# Altium PCB PA-15-30W-VAR2.PcbDoc
Units mm, origin at the board's own origin, x right, y up, seen from the top; angles counter-clockwise.
Board outline 100 x 100 mm, 2 copper layers (Top Layer, Bottom Layer), stack 1.571 mm thick; 175 components, 119 nets, 501 pads, 0 vias.
Unrouted connection lines stored in the file: 376.
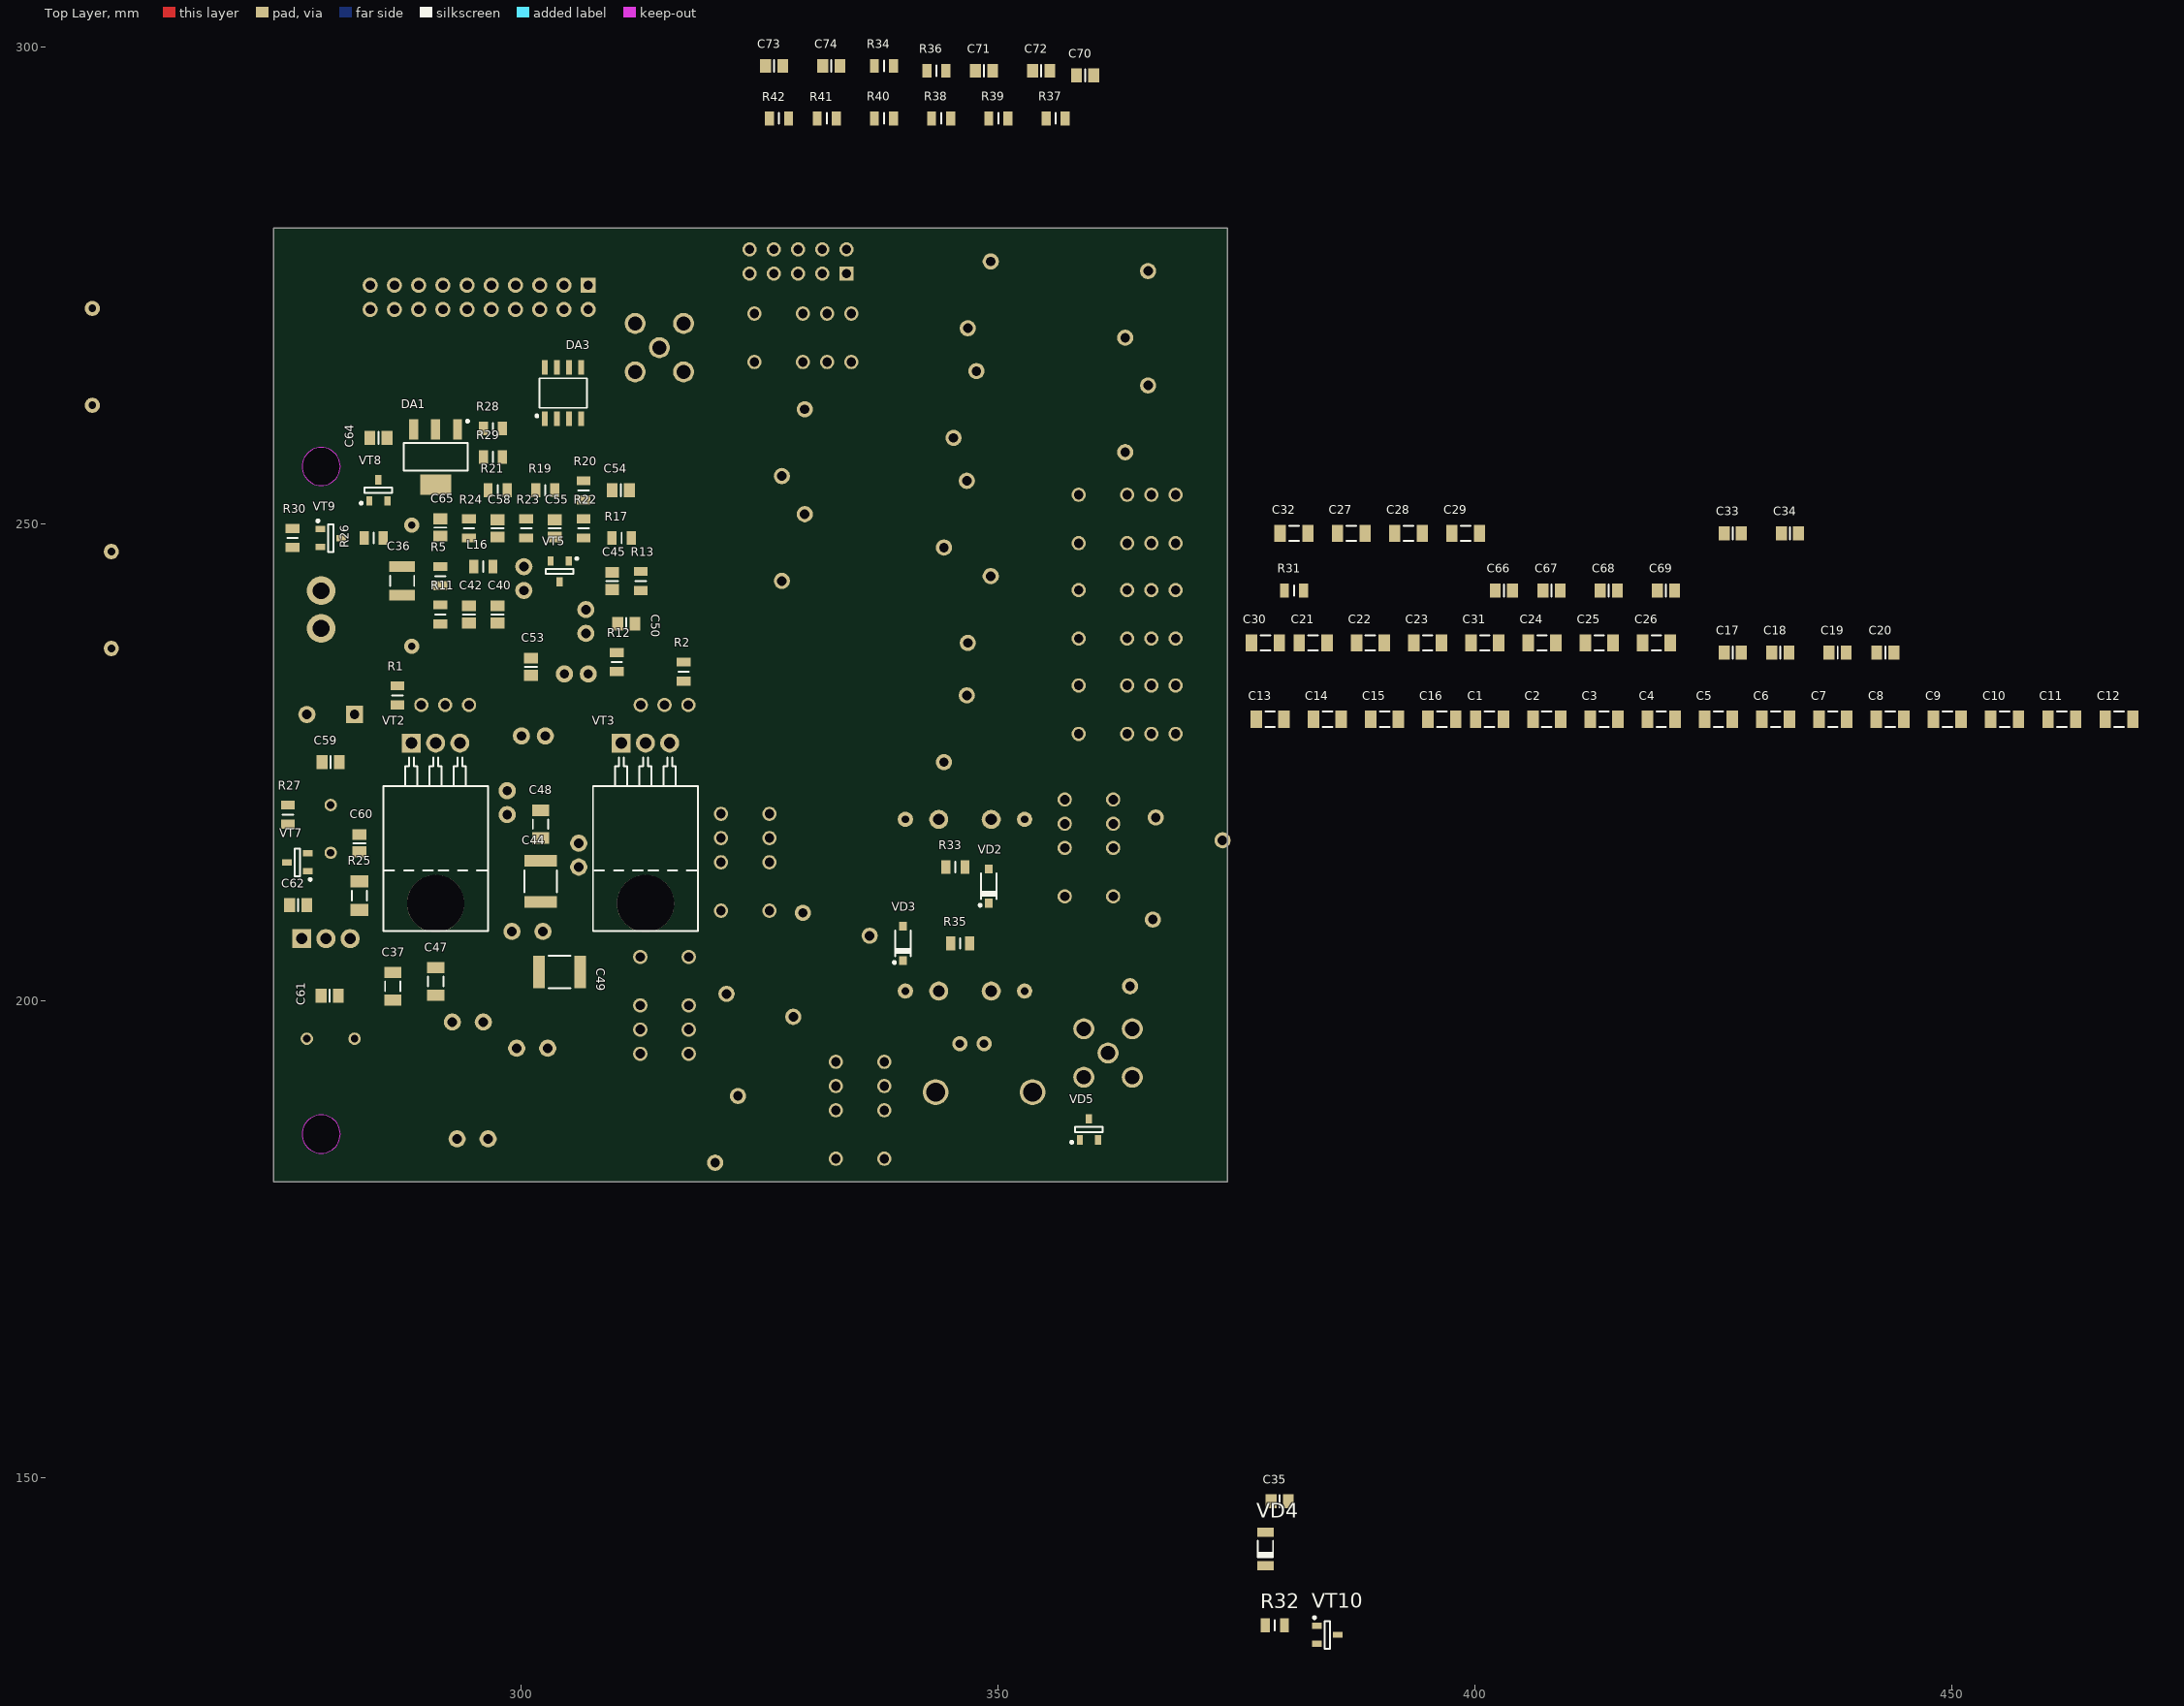
[diagram p0: Top Layer view]
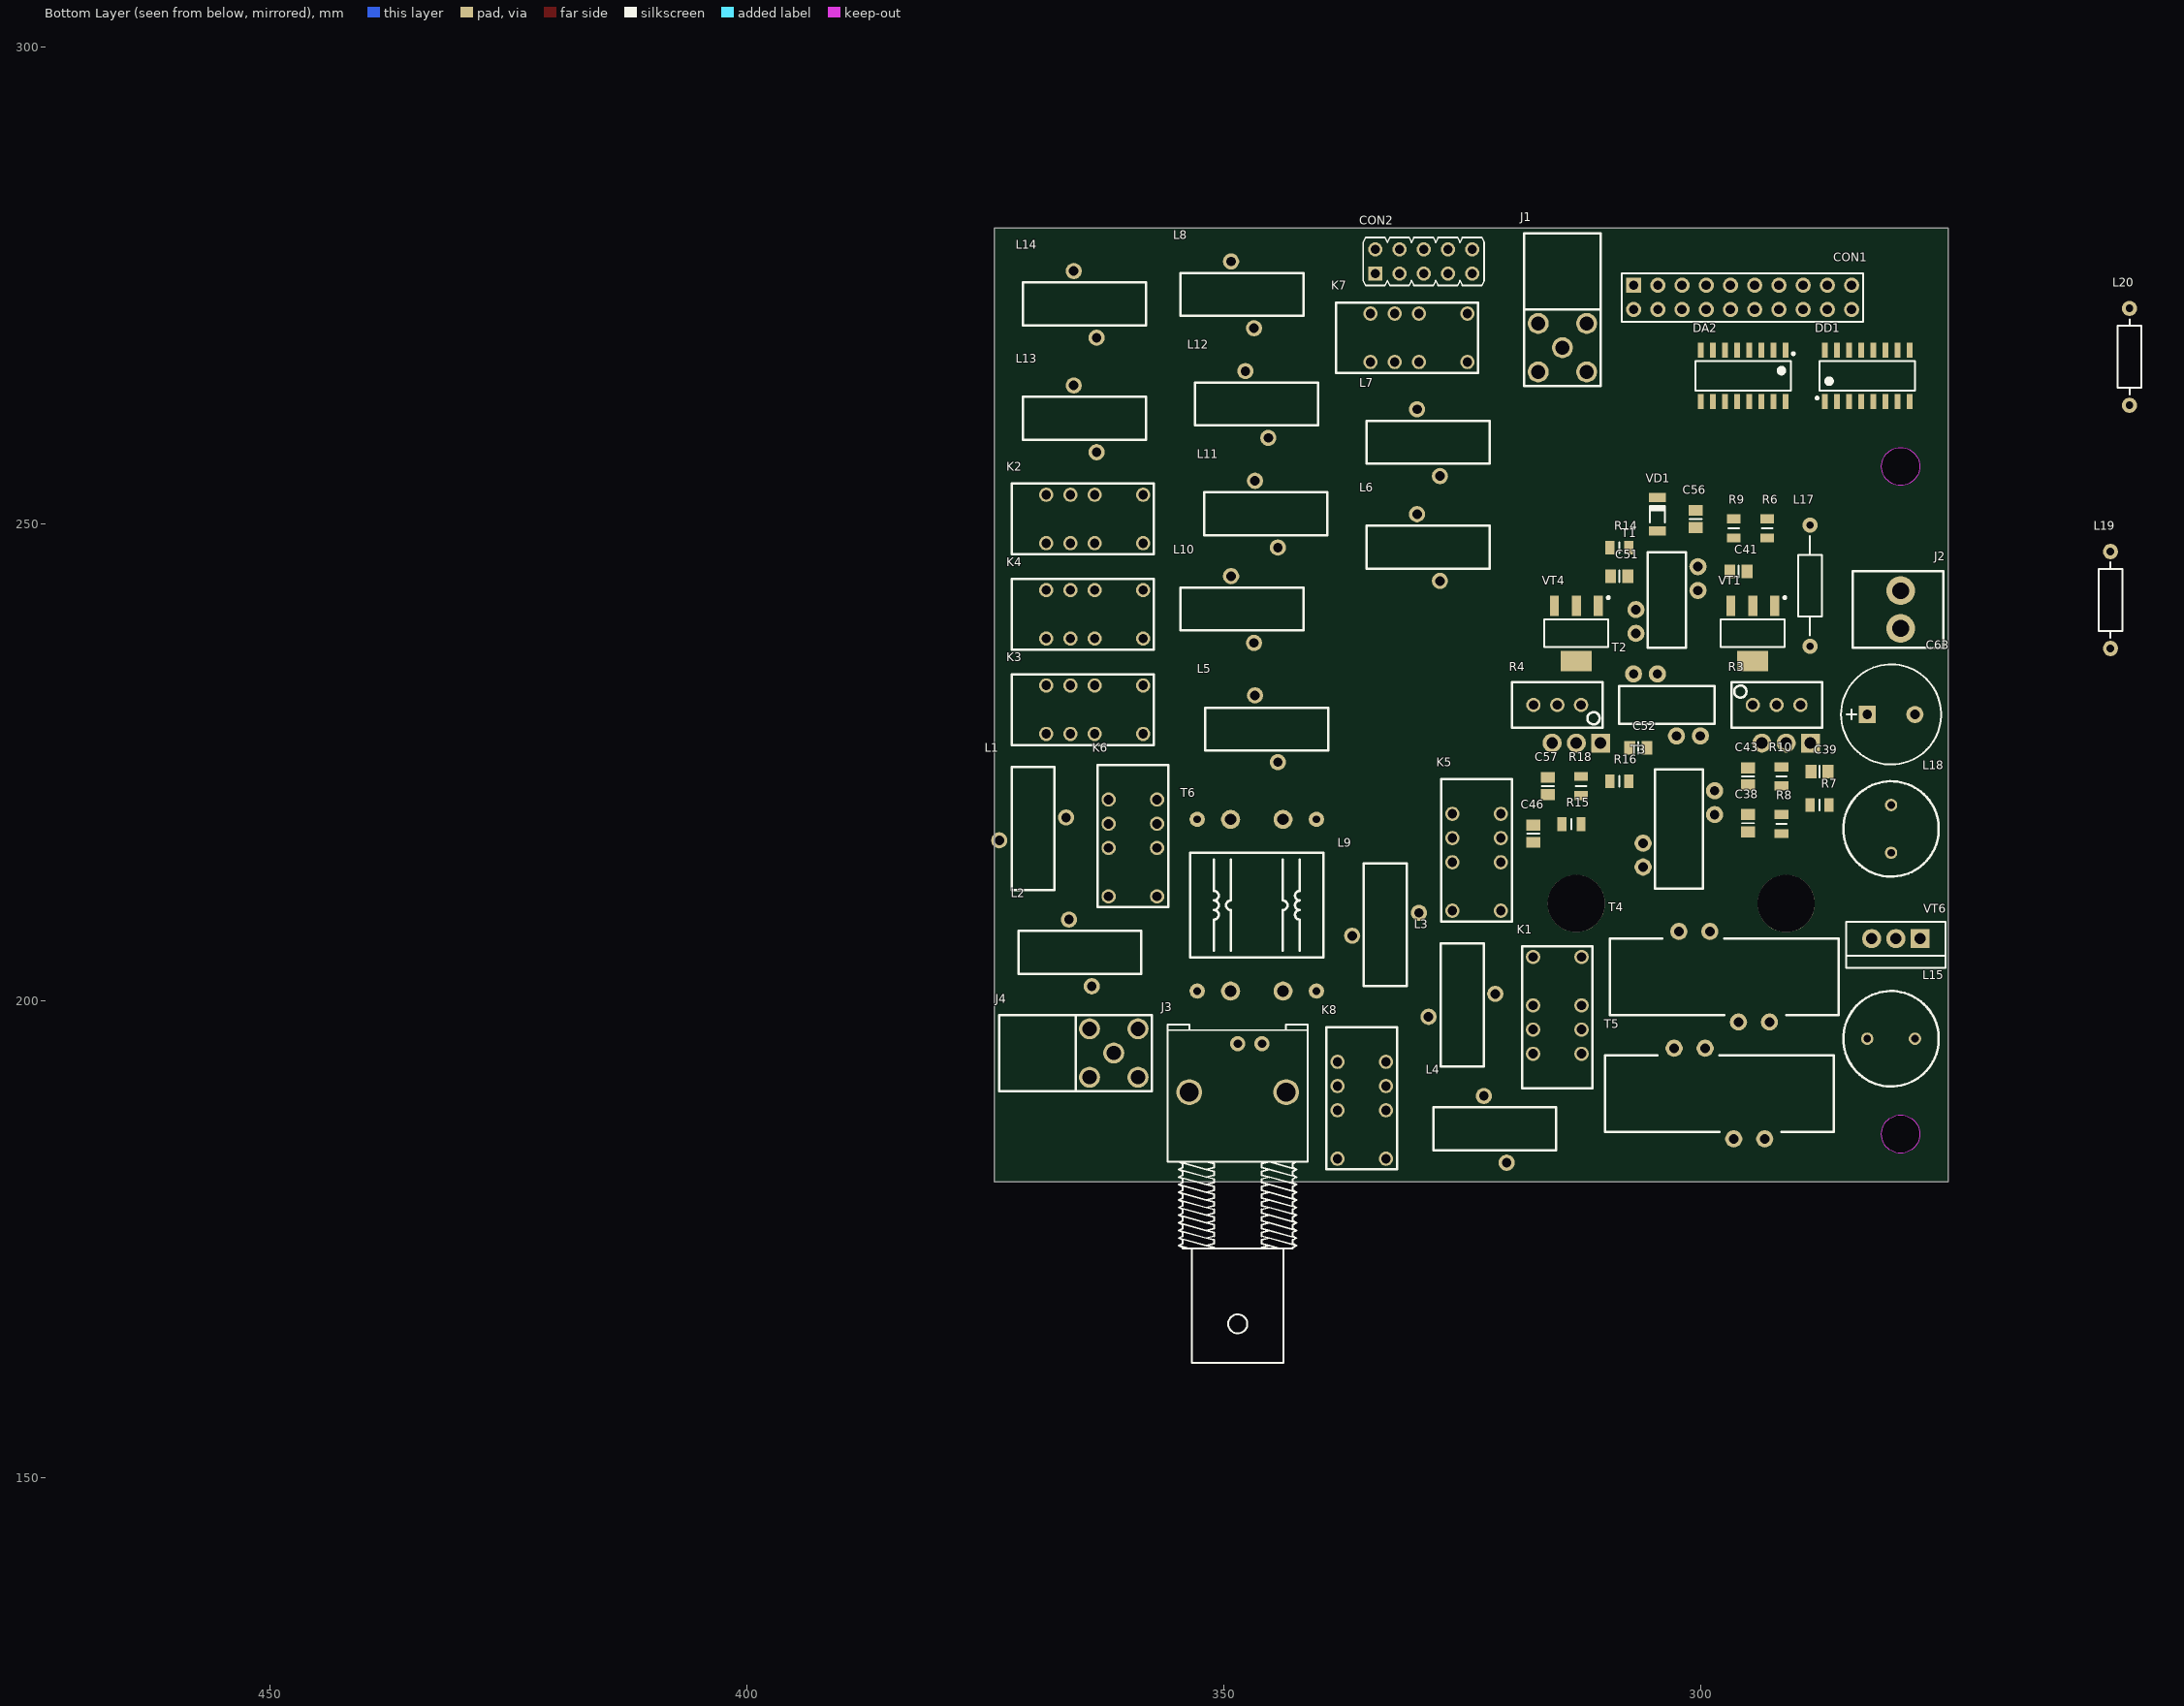
[diagram p1: Bottom Layer view, seen from below]

## Layer stack, top to bottom
Top Solder: solder mask 0.0102, Solder Resist, Dk 3.5
Top Layer: signal copper 0.0356
Dielectric 1: dielectric 1.5, FR-4, Dk 4.8
Bottom Layer: signal copper 0.0356
Bottom Solder: solder mask 0.0102, Solder Resist, Dk 3.5

## Board outline
274,281 374,281 374,181 274,181
cut-out: 277,256 ccw(c279,256) 279,254 ccw(c279,256) 281,256 ccw(c279,256) 279,258 ccw(c279,256)
cut-out: 277,186 ccw(c279,186) 279,184 ccw(c279,186) 281,186 ccw(c279,186) 279,188 ccw(c279,186)

## Design rules (kind name [scope] priority, off if disabled: settings)
Clearance [All] p1: gap=0.254 ignorepadtopadclearanceinfootprint=FALSE except(0: Arc-Hole Track-Hole SMDPad-Hole THPad-Hole Via-Hole Fill-Hole Poly-Hole Region-Hole Text-Hole)
ComponentClearance [All] p1: gap=0.5 collisioncheckmode=3 verticalgap=0.5 showdistances=TRUE donotcheckwithout3dbody=TRUE checkcomponentboundary=TRUE
PolygonConnect [All] p1: connectstyle=Relief reliefconductorwidth=0.254 reliefentries=4 polygonreliefangle="90 Angle" airgapwidth=0.254
RoutingVias [All] p1: holewidth=0.711 width=1.27 viastyle="Through Hole" minholewidth=0.711 minwidth=1.27 maxholewidth=0.711 maxwidth=1.27
SolderMaskExpansion [All] p1: expansion=0.102 istentingtop=FALSE
Width [All] p1: maxlimit=0.254 minlimit=0.254 preferedwidth=0.254
29 further rules are at their usual default settings.

## Classes and differential pairs
net class HF_LPF[0..6]: HF_LPF0 HF_LPF1 HF_LPF2 HF_LPF3 HF_LPF4 HF_LPF5 HF_LPF6
component class swr-antenna: C70 C71 C72 C73 C74 DA3 J3 J4 K8 L19 L20 R33 R34 R35 R36 R37 R38 R39 R40 R41 R42 T6 VD2 VD3 VD4 VD5
component class LPF: C1 C2 C3 C4 C5 C6 C7 C8 C9 C10 C11 C12 C13 C14 C15 C16 C17 C18 C19 C20 C21 C22 C23 C24 C25 C26 C27 C28 C29 C30 C31 C32 C33 C34 C35 K1 K2 K3 K4 K5 K6 K7 L1 L2 L3 L4 L5 L6 L7 L8 L9 L10 L11 L12 L13 L14
component class control-interface: C66 C67 C68 C69 CON1 CON2 DA2 DD1 R31 R32 VT10
component class amplifier: C36 C37 C38 C39 C40 C41 C42 C43 C44 C45 C46 C47 C48 C49 C50 C51 C52 C53 C54 C55 C56 C57 C58 C59 C60 C61 C62 C63 C64 C65 DA1 J1 J2 L15 L16 L17 L18 R1 R2 R3 R4 R5 R6 R7 R8 R9 R10 R11 R12 R13 R14 R15 R16 R17 R18 R19 R20 R21 R22 R23 R24 R25 R26 R27 R28 R29 R30 T1 T2 T3 T4 T5 VD1 VT1 VT2 VT3 VT4 VT5 VT6 VT7 VT8 VT9

## Components (designator, comment, footprint, x,y, rotation, side; value= is the part's Value field where it differs from the comment)
C1 "1271" CAPC3216X125N 401.5,229.5 r0 top
C2 "1100" CAPC3216X125N 407.5,229.5 r0 top
C3 "1228" CAPC3216X125N 413.5,229.5 r0 top
C4 "756.7" CAPC3216X125N 419.5,229.5 r0 top
C5 "1000" CAPC3216X125N 425.5,229.5 r0 top
C6 "386" CAPC3216X125N 431.5,229.5 r0 top
C7 "464.8" CAPC3216X125N 437.5,229.5 r0 top
C8 "470" CAPC3216X125N 443.5,229.5 r0 top
C9 "356.4" CAPC3216X125N 449.5,229.5 r0 top
C10 "288.9" CAPC3216X125N 455.5,229.5 r0 top
C11 "330" CAPC3216X125N 461.5,229.5 r0 top
C12 "199.1" CAPC3216X125N 467.5,229.5 r0 top
C13 "1271" CAPC3216X125N 378.5,229.5 r0 top
C14 "756.7" CAPC3216X125N 384.5,229.5 r0 top
C15 "464.8" CAPC3216X125N 390.5,229.5 r0 top
C16 "288.9" CAPC3216X125N 396.5,229.5 r0 top
C17 "0.1uF" CAPC2013X100N 427,236.5 r0 top
C18 "0.1uF" CAPC2013X100N 432,236.5 r0 top
C19 "0.1uF" CAPC2013X100N 438,236.5 r0 top
C20 "0.1uF" CAPC2013X100N 443,236.5 r0 top
C21 "171.8" CAPC3216X125N 383,237.5 r0 top
C22 "220" CAPC3216X125N 389,237.5 r0 top
C23 "94.6" CAPC3216X125N 395,237.5 r0 top
C24 "106" CAPC3216X125N 407,237.5 r0 top
C25 "180" CAPC3216X125N 413,237.5 r0 top
C26 "8.5" CAPC3216X125N 419,237.5 r0 top
C27 "61.69" CAPC3216X125N 387,249 r0 top
C28 "100" CAPC3216X125N 393,249 r0 top
C29 "9.7" CAPC3216X125N 399,249 r0 top
C30 "171.8" CAPC3216X125N 378,237.5 r0 top
C31 "106" CAPC3216X125N 401,237.5 r0 top
C32 "61.69" CAPC3216X125N 381,249 r0 top
C33 "0.1uF" CAPC2013X100N 427,249 r0 top
C34 "0.1uF" CAPC2013X100N 433,249 r0 top
C35 "0.1uF" CAPC2013X100N 379.5,147.5 r0 top
C36 "47uF" CAPC3225X270N 287.5,244 r90 top
C37 "0.1uF" CAPC3216X125N 286.5,201.5 r90 top
C38 "0.1uF" CAPC2013X100N 295,218.6 r90 bottom
C39 "0.1uF" CAPC2013X100N 287.5,224 r0 bottom
C40 "0.1uF" CAPC2013X100N 297.5,240.5 r270 top
C41 "0.1uF" CAPC2013X100N 296,245 r0 bottom
C42 "0.1uF" CAPC2013X100N 294.5,240.5 r90 top
C43 "0.1uF" CAPC2013X100N 295,223.5 r90 bottom
C44 "0.1uF" CAPC4532X218N 302,212.5 r270 top
C45 "0.1uF" CAPC2013X100N 309.5,244 r90 top
C46 "0.1uF" CAPC2013X100N 317.5,217.5 r90 bottom
C47 "0.1uF" CAPC3216X125N 291,202 r270 top
C48 "180*" CAPC3216X125N 302,218.5 r270 top
C49 "0.1uF" CAPC4532X218N 304,203 r180 top
C50 "0.1uF" CAPC2013X100N 311,239.5 r180 top
C51 "0.1uF" CAPC2013X100N 308.5,244.5 r180 bottom
C52 "0.1uF" CAPC2013X100N 306.5,226.5 r180 bottom
C53 "0.1uF" CAPC2013X100N 301,235 r90 top
C54 "0.1uF" CAPC2013X100N 310.4,253.5 r180 top
C55 "0.1uF" CAPC2013X100N 303.5,249.5 r270 top
C56 "0.1uF" CAPC2013X100N 300.5,250.5 r90 bottom
C57 "0.1uF" CAPC2013X100N 316,222.5 r270 bottom
C58 "0.1uF" CAPC2013X100N 297.5,249.5 r270 top
C59 "0.1uF" CAPC2013X100N 280,225 r180 top
C60 "0.1uF" CAPC2013X100N 283,216.5 r90 top
C61 "0.1uF" CAPC2013X100N 279.9,200.5 r0 top
C62 "0.1uF" CAPC2013X100N 276.6,210 r180 top
C63 "100uF" CAPPR500-1050X1300 280,230 r180 bottom
C64 "0.1uF" CAPC2013X100N 285,259 r0 top
C65 "0.1uF" CAPC2013X100N 291.5,249.6 r270 top
C66 "2.2uF" CAPC2013X100N 403,243 r0 top
C67 "0.1uF" CAPC2013X100N 408,243 r0 top
C68 "0.1uF" CAPC2013X100N 414,243 r0 top
C69 "2.2uF" CAPC2013X100N 420,243 r0 top
C70 "0.1uF" CAPC2013X100N 359.1,297 r0 top
C71 "10uF" CAPC2013X100N 348.5,297.5 r0 top
C72 "0.1uF" CAPC2013X100N 354.5,297.5 r0 top
C73 "0.1uF" CAPC2013X100N 326.5,298 r0 top
C74 "0.1uF" CAPC2013X100N 332.5,298 r0 top
CON1 "PBD-20" PBD-20 295.57,273.73 r180 bottom locked
CON2 "PLD-10" PLD-10 329,277.5 r180 bottom
DA1 "LD1117" SOT230P700X180-4N 291,257 r270 top
DA2 "ULN2003A" SOIC127P600X175-16N 295.5,265.5 r270 bottom
DA3 "LM358" SOIC127P600X175-8N 304.365,263.7 r90 top
DD1 "74HCT595D" SOIC127P600X175-16N 282.5,265.5 r90 bottom
J1 "SMA001" SMA002 314.46,268.46 r180 bottom
J2 "PWL-2" PWL-2 279,241 r90 bottom
J3 "BNC" BNC-TYCO_1-1337542-0 348.5,190 r270 bottom
J4 "SMA002" SMA002 361.5,194.5 r90 bottom
K1 "G6S-2-12VDC" G6S-2 315,199.5 r180 bottom
K2 "G6S-2-12VDC" G6S-2 363.5,250.5 r270 bottom
K3 "G6S-2-12VDC" G6S-2 363.5,230.5 r270 bottom
K4 "G6S-2-12VDC" G6S-2 363.5,240.5 r270 bottom
K5 "G6S-2-12VDC" G6S-2 323.46,214.5 r0 bottom
K6 "G6S-2-12VDC" G6S-2 359.5,216 r0 bottom
K7 "G6S-2-12VDC" G6S-2 329.5,269.5 r270 bottom
K8 "G6S-2-12VDC" G6S-2 335.5,188.5 r0 bottom
L1 "4.375u" T50-2 370,218 r270 bottom
L2 "4.375u" T50-2 365,205 r180 bottom
L3 "2.604uH" T50-2 325,199.5 r270 bottom
L4 "2.604uH" T50-2 321.5,186.5 r180 bottom
L5 "1.5uH" T50-6 345.5,228.5 r0 bottom
L6 "1.5uH" T50-6 328.5,247.5 r180 bottom
L7 "994.9nH" T50-6 328.5,258.5 r180 bottom
L8 "994.9nH" T50-6 348,274 r180 bottom
L9 "591.3nH" T50-6 333,208 r90 bottom
L10 "591.3nH" T50-6 348,241 r180 bottom
L11 "342.2nH" T50-6 345.5,251 r180 bottom
L12 "342.2nH" T50-6 346.5,262.5 r180 bottom
L13 "199.1nH" T50-6 364.5,261 r180 bottom
L14 "199.1nH" T50-6 364.5,273 r180 bottom
L15 "4.7uH" "Inductor radial" 280,196 r180 bottom
L16 "10uH" RESC2013X64N 296,245.5 r180 top
L17 "3.3uH" RES1270-650X250 288.5,243.5 r90 bottom
L18 "4.7uH" "Inductor radial" 280,218 r270 bottom
L19 "100uH" RES1016-650X250 257,242 r270 bottom
L20 "100uH" RES1016-650X250 255,267.5 r90 bottom
R1 "2.2k" RESC2013X64N 287,232 r270 top
R2 "2.2k" RESC2013X64N 317,234.5 r270 top
R3 "4.7k" 3296W 292,231 r180 bottom
R4 "4.7k" 3296W 315,231 r0 bottom
R5 "6.8k" RESC2013X64N 291.5,244.5 r90 top
R6 "330" RESC2013X64N 293,249.5 r270 bottom
R7 "1k" RESC2013X64N 287.5,220.5 r180 bottom
R8 "330" RESC2013X64N 291.5,218.5 r270 bottom
R9 "330" RESC2013X64N 296.5,249.5 r270 bottom
R10 "3.3*" RESC2013X64N 291.5,223.5 r90 bottom
R11 "560" RESC2013X64N 291.5,240.5 r270 top
R12 "560" RESC2013X64N 310,235.5 r270 top
R13 "4.7k" RESC2013X64N 312.5,244 r90 top
R14 "330" RESC2013X64N 308.5,247.5 r180 bottom
R15 "1k" RESC2013X64N 313.5,218.5 r0 bottom
R16 "3.3*" RESC2013X64N 308.5,223 r180 bottom
R17 "330" RESC2013X64N 310.5,248.5 r0 top
R18 "330" RESC2013X64N 312.5,222.5 r90 bottom
R19 "0" RESC2013X64N 302.5,253.5 r180 top
R20 "*" RESC2013X64N 306.5,253.5 r90 top
R21 "*" RESC2013X64N 297.5,253.5 r0 top
R22 "1k" RESC2013X64N 306.5,249.5 r270 top
R23 "33" RESC2013X64N 300.5,249.5 r270 top
R24 "47" RESC2013X64N 294.5,249.5 r90 top
R25 "0.125" RESC3216X80N 283,211 r90 top
R26 "100k" RESC2013X64N 284.5,248.5 r0 top
R27 "4.7k" RESC2013X64N 275.5,219.5 r90 top
R28 "*" RESC2013X64N 297,260 r180 top
R29 "*" RESC2013X64N 297,257 r180 top
R30 "100k" RESC2013X64N 276,248.5 r90 top
R31 "10k" RESC2013X64N 381,243 r0 top
R32 "10k" RESC2013X64N 378.999,134.5 r0 top
R33 "2.2k" RESC2013X64N 345.5,214 r0 top
R34 "50" RESC2013X64N 338,298 r0 top
R35 "50" RESC2013X64N 346,206 r0 top
R36 "2.2k" RESC2013X64N 343.5,297.5 r0 top
R37 "100" RESC2013X64N 356,292.5 r0 top
R38 "22k" RESC2013X64N 344,292.5 r0 top
R39 "22k" RESC2013X64N 350,292.5 r0 top
R40 "*" RESC2013X64N 338,292.5 r0 top
R41 "100" RESC2013X64N 332,292.5 r0 top
R42 "*" RESC2013X64N 327,292.5 r0 top
T1 "R10*6*4 N87" R10x6x4 303.5,242 r90 bottom
T2 "R10*6*4 N87" R10x6x4 303.5,231 r180 bottom
T3 "R12,5*7,5*5 N87" R12.5x7.5x5 302.25,218 r270 bottom
T4 "TP4A-T22/14/6-C TDG" R22x14x6 297.5,202.5 r0 bottom
T5 "TP4A-T22/14/6-C TDG" R22x14x6 298,190.25 r0 bottom
T6 "BN43-302" TANDEM 346.5,210 r270 bottom
VD1 "LL4148" DIOMELF3515N 304.5,251 r270 bottom
VD2 "BAT46ZFILM" SOD3816X118N 349,212 r90 top
VD3 "BAT46ZFILM" SOD3816X118N 340,206 r90 top
VD4 "LL4148" DIOMELF3515N 377.999,142.5 r90 top
VD5 "BAT54SL" SOT95P229X119-3N 359.5,186.5 r90 top
VT1 "BFG591" SOT230P700X180-4N 294.5,238.5 r270 bottom
VT2 "RD15HVF1" TO-220-HFLIP 291,227 r180 top locked
VT3 "RD15HVF1" TO-220-HFLIP 313,227 r180 top locked
VT4 "BFG591" SOT230P700X180-4N 313,238.5 r270 bottom
VT5 "BFR93A" SOT95P229X119-3N 304,245 r270 top
VT6 "IRF4905" TO-220-v 279.5,206.5 r0 bottom
VT7 "MMBT3906" SOT95P229X119-3N 276.5,214.5 r180 top
VT8 "IRLML9301TRP" SOT95P229X119-3N 285,253.5 r90 top
VT9 "NX7002AK" SOT95P229X119-3N 280,248.5 r0 top
VT10 "NX7002AK" SOT95P229X119-3N 384.499,133.5 r0 top

## Footprints (in the part's own frame and the unit in brackets; to place one, negate y for a bottom-side part, rotate by r counter-clockwise, add the part's x,y. Pads: shape width x height; smd on the part's side, far side on the other; paste and mask are expansions set on the pad)
3296W [mm] "Square Trimming Potentiometer"
  round 1.5 hole 1: 1(-2.5,0) 2(0,0) 3(2.5,0)
  silkscreen extent -4.75,-2.4 4.75,2.4, body extent -4.76,-2.41 4.76,2.42, height 11.55
BNC-TYCO_1-1337542-0 [mm] "50 Ohms  BNC Elbow PCB Socket With Mounting Posts"
  round 1.6 hole 0.9: 1(-5.48,0) 2(-5.48,2.54)
  round 2.7 hole 2: 3(-0.4,-5.08) 3(-0.4,5.08)
  silkscreen extent -7.5,-7.35 28,7.35, body extent -7.5,-7.35 28,7.35, height 13.16
CAPC2013X100N [mm] "Capacitor, Non-Polarized, Chip; 2.00mm L X 1.25mm W X 0.9mm H, IPC Medium Density"
  rect 1.15x1.45 smd: 1(-0.9,0) 2(0.9,0)
  silkscreen extent 0,-0.63 0,0.63, body extent -1.1,-0.72 1.1,0.73, height 1
CAPC3216X125N [mm] "Capacitor, Non-Polarized, Chip; 3.20mm L X 1.60mm W X 1.25mm H, IPC Medium Density"
  rect 1.2x1.8 smd: 1(-1.45,0) 2(1.45,0)
  silkscreen extent -0.5,-0.8 0.5,0.8, body extent -1.7,-0.9 1.7,0.9, height 1.25
CAPC3225X270N [mm] "Chip Capacitor, Body 3.2x2.5mm, IPC Medium Density"
  rect 1.15x2.7 smd: 1(-1.5,0) 2(1.5,0)
  silkscreen extent -0.55,-1.25 0.55,1.25, body extent -1.7,-1.35 1.7,1.35, height 2.7
CAPC4532X218N [mm] "Chip Capacitor, 2-Leads, Body 4.5x3.2mm, IPC Medium Density"
  rect 1.2x3.4 smd: 1(-2.15,0) 2(2.15,0)
  silkscreen extent -1.15,-1.7 1.15,1.7, body extent -2.37,-1.7 2.38,1.7, height 2.18
CAPPR500-1050X1300 [mm] "Capacitor, Radial, Pin spacing 5.0mm - Body Diameter 10mm (nom) X Body Height 13mm (max)"
  rect 1.8x1.8 hole 1: 1(-2.5,0)
  round 1.8 hole 1: 2(2.5,0)
  silkscreen extent -5.25,-5.25 5.25,5.25, body extent -5.25,-5.25 5.25,5.25, height 13
DIOMELF3515N [mm] "SOD80C, MELF Diode, 2-Leads, Body 3.5x1.5mm, IPC Medium Density"
  rect 1x1.75 smd: 1(-1.75,0) 2(1.75,0)
  silkscreen extent -0.85,-0.8 0.85,0.8, body extent -1.85,-0.8 1.85,0.8, height 1.6
G6S-2 [mm] "Compact, Industry-Standard 2-pole relay,  designed to switch 2A Signal Loads"
  round 1.5 hole 1: 1(-2.54,5.08) 3(-2.54,0) 4(-2.54,-2.54) 5(-2.54,-5.08) 8(2.54,-5.08) 9(2.54,-2.54) 10(2.54,0) 12(2.54,5.08)
  silkscreen extent -3.7,-8.7 3.7,6.2, body extent -3.65,-8.65 3.65,6.15, height 9.2
"Inductor radial" [mm] "5.0mm"
  round 1.3 hole 0.8: 1(-2.5,0) 2(2.5,0)
  silkscreen extent -5,-5 5,5, body extent -4.25,-4.25 4.25,4.25, height 11
PBD-20 [mm] "20 Contacts - Pitch 2.54mm - Top Entry, Dual Row Through Mount Receptacle"
  rect 1.6x1.6 hole 1: 1(-11.43,1.27)
  round 1.6 hole 1: 2(-11.43,-1.27) 3(-8.89,1.27) 4(-8.89,-1.27) 5(-6.35,1.27) 6(-6.35,-1.27) 7(-3.81,1.27) 8(-3.81,-1.27) 9(-1.27,1.27) 10(-1.27,-1.27) 11(1.27,1.27) 12(1.27,-1.27) 13(3.81,1.27) 14(3.81,-1.27) 15(6.35,1.27) 16(6.35,-1.27) 17(8.89,1.27) 18(8.89,-1.27) 19(11.43,1.27) 20(11.43,-1.27)
  silkscreen extent -12.66,-2.54 12.66,2.54, body extent -12.7,-2.54 12.7,2.54, height 8.5
PLD-10 [mm] "10 Contacts - Pitch 2.54mm - Dual Row Through Mount Straight Header (Post Lead = 6.35mm, Tail Lead 3.05mm, Insulator 1.52mm)"
  rect 1.5x1.5 hole 1: 1(-5.08,-1.27)
  round 1.5 hole 1: 2(-5.08,1.27) 3(-2.54,-1.27) 4(-2.54,1.27) 5(0,-1.27) 6(0,1.27) 7(2.54,-1.27) 8(2.54,1.27) 9(5.08,-1.27) 10(5.08,1.27)
  silkscreen extent -6.35,-2.51 6.35,2.51, body extent -6.35,-2.51 6.35,2.51, height 7.87
PWL-2 [mm] "PCB Connector; Rated Voltage: 50/250V AC.DC; Rated Current: 5A"
  round 3 hole 1.75: 1(-1.98,0) 2(1.98,0)
  silkscreen extent -4,-4.5 4,5, body extent -3.98,-4.5 3.94,5.1, height 14.05
R10x6x4 [mm]
  round 1.8 hole 1: 1(1,-3.25) 2(3.5,-3.25) 3(-1,3.25) 4(-3.5,3.25)
  silkscreen extent -5,-2 5,2, body extent -5,-2 5,2, height 10
R12.5x7.5x5 [mm]
  round 1.8 hole 1: 1(1.5,-3.75) 2(4,-3.75) 3(-1.5,3.75) 4(-4,3.75)
  silkscreen extent -6.25,-2.5 6.25,2.5, body extent -6.25,-2.5 6.25,2.5, height 12.5
R22x14x6 [mm]
  round 1.8 hole 1: 1(1.5,-4.75) 2(4.75,-4.75) 3(-1.5,4.75) 4(-4.75,4.75)
  silkscreen extent -12,-4 12,4, body extent -11,-3 11,3, height 22
RES1016-650X250 [mm] "Resistor, Axial, Pad spacing 10.16 mm - Body Lengh 6.5mm X Body Diameter 2.5mm"
  round 1.6 hole 0.8: 1(-5.08,0) 2(5.08,0)
  silkscreen extent -3.95,-1.25 3.95,1.25, body extent -5.38,-1.27 5.38,1.26, height 2.51
RES1270-650X250 [mm] "Resistor, Axial, Pad spacing 10.16 mm - Body Lengh 6.6mm X Body Diameter 2.5mm"
  round 1.6 hole 0.8: 1(-6.35,0) 2(6.35,0)
  silkscreen extent -5.2,-1.25 5.2,1.25, body extent -6.65,-1.25 6.65,1.25, height 2.5
RESC2013X64N [mm] "Chip Resistor, EIA 0805, Metric 2013, Body 2.03x1.27mm, IPC Medium Density"
  rect 0.95x1.45 smd: 1(-1,0) 2(1,0)
  silkscreen extent 0,-0.55 0,0.55, body extent -1.02,-0.63 1.02,0.64, height 0.64
RESC3216X80N [mm] "Chip Resistor, EIA 1206, Metric 3216, Body 3.2x1.6mm, IPC Medium Density"
  rect 1.25x1.85 smd: 1(-1.5,0) 2(1.5,0)
  silkscreen extent -0.5,-0.8 0.5,0.8, body extent -1.67,-0.87 1.68,0.88, height 0.8
SMA002 [mm] "SMA Connector Series"
  round 2.2 hole 1.5: 1(0,0) 2(-2.54,-2.54) 2(-2.54,2.54) 2(2.54,-2.54) 2(2.54,2.54)
  silkscreen extent -4,-4 4,12, body extent -3.18,-3.18 3.18,11.63, height 9.97
SOD3816X118N [mm] "SOD Diode (SOD-123); 2.70mm W X 1.60mm L X 1.18mm H body, IPC Medium Density"
  rect 0.95x0.8 smd: 1(-1.8,0) 2(1.8,0)
  silkscreen extent -2.12,-0.8 1.35,1.02, body extent -1.95,-0.9 1.95,0.9, height 1.18
SOIC127P600X175-8N [mm] "SOIC 8, Pitch 1.27mm - Body 4x5mm, IPC Medium Density"
  rect 1.55x0.6 smd: 1(-2.7,1.905) 2(-2.7,0.635) 3(-2.7,-0.635) 4(-2.7,-1.905) 5(2.7,-1.905) 6(2.7,-0.635) 7(2.7,0.635) 8(2.7,1.905)
  silkscreen extent -2.52,-2.5 1.55,2.88, body extent -3.1,-2.5 3.1,2.5, height 1.75
SOIC127P600X175-16N [mm] "SOIC 16, Pitch 1.27mm - Body 4x10mm, IPC Medium Density"
  rect 1.55x0.6 smd: 1(-2.7,4.445) 2(-2.7,3.175) 3(-2.7,1.905) 4(-2.7,0.635) 5(-2.7,-0.635) 6(-2.7,-1.905) 7(-2.7,-3.175) 8(-2.7,-4.445) 9(2.7,-4.445) 10(2.7,-3.175) 11(2.7,-1.905) 12(2.7,-0.635) 13(2.7,0.635) 14(2.7,1.905) 15(2.7,3.175) 16(2.7,4.445)
  silkscreen extent -2.45,-5 1.55,5.37, body extent -3.1,-5 3.1,5, height 1.75
SOT95P229X119-3N [mm] "SOT23 3-Leads, 0.95mm pitch; 3 pin, 1.296mm W X 2.858mm L X 1.194mm H body, IPC Medium Density"
  rect 1x0.65 smd: 1(-1.1,0.95) 2(-1.1,-0.95) 3(1.1,0)
  silkscreen extent -1.47,-1.45 0.28,1.92, body extent -1.25,-1.5 1.25,1.5, height 1.19
SOT230P700X180-4N [mm] "SOT223, 2.30mm pitch; 3 pin, 3.70mm W X 6.70mm L, IPC Medium Density"
  rect 2.15x0.95 smd: 1(-2.9,2.3) 2(-2.9,0) 3(-2.9,-2.3)
  rect 2.15x3.25 smd: 4(2.9,0)
  silkscreen extent -3.87,-3.35 1.45,3.48, body extent -3.65,-3.35 3.65,3.35, height 1.81
T50-2 [mm]
  round 1.7 hole 1: 1(-1.2,3.5) 2(1.2,-3.5)
  silkscreen extent -6.5,-2.2 6.4,2.3, body extent -6.5,-2.3 6.5,2.3, height 13.08
T50-6 [mm]
  round 1.7 hole 1: 1(-1.2,3.5) 2(1.2,-3.5)
  silkscreen extent -6.5,-2.2 6.4,2.3, body extent -6.5,-2.3 6.5,2.3, height 13.08
TANDEM [mm]
  round 2 hole 1.2: 1(-9,2.75) 2(9,2.75) 7(-9,-2.75) 8(9,-2.75)
  round 1.6 hole 0.8: 3(-9,6.25) 4(9,6.25) 5(-9,-6.25) 6(9,-6.25)
  silkscreen extent -5.5,-7 5.5,7, body extent -5.12,-6.62 5.13,6.58, height 7.55
TO-220-HFLIP [mm] "TO-220 3-Terminal + Tab - Flipped Horizontal Mount"
  rect 2x2 hole 1.2: 1(2.54,0)
  round 2 hole 1.2: 2(0,0) 3(-2.54,0)
  round 6 hole 6: ""(0,16.828)
  silkscreen extent -5.5,1.5 5.5,19.68, body extent -5.27,-0.28 5.27,19.49, height 4.7
TO-220-v [mm] "TO-220 3-Terminal - Vertical Mount"
  rect 2x2 hole 1.2: 1(-2.54,0)
  round 2 hole 1.2: 2(0,0) 3(2.54,0)
  silkscreen extent -5.21,-1.78 5.21,3.05, body extent -5.27,-1.75 5.27,2.95, height 20.5

## Part data
C1 C2 C3 C4 C5 C6 C7 C8 C9 C10 C11 C12 C13 C14 C15 C16 C21 C22 C23 C24 C25 C26 C27 C28 C29 C30 C31 C32 C48: library part Cap1206, "Capacitor 3.2x1.6 mm"
C17 C18 C19 C20 C33 C34 C35 C38 C39 C40 C41 C42 C43 C45 C46 C50 C51 C52 C53 C54 C55 C56 C57 C58 C59 C60 C61 C62 C64 C65 C66 C67 C68 C69 C70 C71 C72 C73 C74: library part Cap0805, "Capacitor 2x1.25 mm"
C36: library part Cap1210, "GRM32ER71A476KE15L"
C37 C47: library part Cap1206, "FM31X104K251EEG"
C44: library part Cap1812, "GRM43DR72J104KW01 (1812, X7R:EIA, 0.1uF, DC630V)"
C49: library part Cap1812, "GRM43DR72J104KW01(1812, X7R:EIA, 0.1uF, DC630V)"
C63: library part CapPolarized, "EEUFR1E471"
CON1: library part CONNECTOR-20
CON2: library part CONNECTOR-10
DA1: "Adjustable and fixed low drop positive voltage regulator"
DA2: "High Voltage, High Current / Darlington Transistor Arrays"
DA3: "Single Supply Dual / Operational Amplifiers"
DD1: "8-bit serial-in, serial or parallel-out shift register with output / latches; 3-state"
J1 J4: library part "RF Connector"
J2: library part PWR_CONNECTOR
J3: library part "RF Connector", "EM-BC028M-NGP-50"
K1 K2 K3 K4 K5 K6 K7 K8: "Compact, Industry-Standard 2-pole relay"
L1 L2 L3 L4: library part Inductor, "T50-2"
L5 L6 L7 L8 L9 L10 L11 L12 L13 L14: library part Inductor, "T50-6"
L15 L18: library part Inductor, "Bochen, 4.7µH±10%, Idc=5.0А, Rdc мax=0.05"
L16: library part Inductor, "SMD 0805 50-100mA"
L17: library part Inductor, "3,3uH ±10% аксиальный дроссель 670mA 0,34Ohm (KLS18-EC36-3R3K-A – KLS)"
L19 L20: library part Inductor, "DLA100-MN Ferrocore"
R1 R2 R5 R6 R7 R8 R9 R10 R11 R12 R13 R14 R15 R16 R17 R18 R19 R20 R21 R22 R23 R24 R26 R27 R28 R29 R30 R31 R32 R33 R34 R35 R36 R37 R38 R39 R40 R41 R42: library part Res0805
R3 R4: library part potentiometer
R25: library part Res0805, "8 items 1 Om in paralel,1206"
T1: library part "transformer type 2", "R10*6*4 N87 (В64290-L38-Х87-Epcos)"
T2 T3: library part "transformer type 1", "transformer"
T4 T5: library part "transformer type 2"
T6: library part "tandem match"
VD1 VD4: library part DIODE
VD2 VD3: library part DIODE, "Small signal Schottky diodes"
VD5: library part DIODE-2-1A-3C-3A-2C
VT1 VT4: "NPN 7 GHz wideband transistor"
VT5: "NPN 6 GHz wideband transistor"
VT6: "HEXFET® Power MOSFET"
VT7: "MMBT3906LT1G, PNP General Purpose Amplifier"
VT9 VT10: library part "N-MOSFET 1G 2S 3D"

## Nets (pads, with @x,y where several pads share a name; then routed paths per layer and width w, separated by ;. In a path a pad name is that pad's centre, name@x,y a point inside that pad or via, vN(x,y) a via of type N, cw(c..) or ccw(c..) an arc to the next point about the centre after c; other vN are vias at no path point)
GND: C1.1 C2.1 C3.1 C4.1 C5.1 C6.1 C7.1 C8.1 C9.1 C10.1 C11.1 C12.1 C13.1 C14.1 C15.1 C16.1 C21.1 C22.1 C23.1 C24.1 C25.1 C26.1 C27.1 C28.1 C29.1 C30.1 C31.1 C32.1 C36.1 C37.2 C39.2 C40.2 C46.1 C47.1 C53.2 C56.2 C59.2 C60.2 C61.2 C63.2 C64.1 C65.1 C66.1 C67.1 C68.1 C69.1 C71.1 C72.1 C73.2 C74.1 CON1.1 CON1.3 CON1.5 CON1.7 CON1.9 CON1.11 CON1.13 CON1.15 CON2.5 CON2.7 DA2.8 DA3.4 DD1.8 DD1.13 J1.2 J2.2 J3.2 J4.2 R1.1 R2.1 R20.1 R21.1 R22.1 R23.1 R24.1 R27.2 R29.1 R30.1 R32.1 R34.1 R35.1 R38.1 R39.2 R40.1 R42.1 T5.4 T6.3 T6.5 VD1.1 VD5.1 VD5.2 VT1.1 VT1.3 VT2.2 VT3.2 VT4.1 VT4.3 VT9.2 VT10.2
HF_LPF0: C17.1 DA2.10 K1.12
HF_LPF1: C18.1 DA2.11 K2.12
HF_LPF2: C19.1 DA2.12 K3.12
HF_LPF3: C20.1 DA2.13 K4.12
HF_LPF4: C33.1 DA2.14 K5.12
HF_LPF5: C34.1 DA2.15 K6.12
HF_LPF6: C35.1 DA2.16 K7.12
HF_TX/RX: C70.1 K8.12 VD4.2 VT10.3
HF_TX_ENA: CON1.10 CON2.8 R30.2 R32.2 VT9.1 VT10.1
NetC1_2: C1.2 K1.5 L1.1
NetC2_2: C2.2 C3.2 L1.2 L2.1
NetC4_2: C4.2 K2.5 L3.1
NetC5_2: C5.2 C6.2 L3.2 L4.1
NetC7_2: C7.2 K3.5 L5.1
NetC8_2: C8.2 C9.2 L5.2 L6.1
NetC10_2: C10.2 K4.5 L7.1
NetC11_2: C11.2 C12.2 L7.2 L8.1
NetC13_2: C13.2 K1.8 L2.2
NetC14_2: C14.2 K2.8 L4.2
NetC15_2: C15.2 K3.8 L6.2
NetC16_2: C16.2 K4.8 L8.2
NetC21_2: C21.2 K5.5 L9.1
NetC22_2: C22.2 C23.2 L9.2 L10.1
NetC24_2: C24.2 K6.5 L11.1
NetC25_2: C25.2 C26.2 L11.2 L12.1
NetC27_2: C27.2 K7.5 L13.1
NetC28_2: C28.2 C29.2 L13.2 L14.1
NetC30_2: C30.2 K5.8 L10.2
NetC31_2: C31.2 K6.8 L12.2
NetC32_2: C32.2 K7.8 L14.2
NetC37_1: C37.1 C47.2 L15.1 T3.2 T3.4
NetC38_1: C38.1 C44.1 C48.2 T3.3 VT2.3
NetC38_2: C38.2 R8.2
NetC39_1: C39.1 R3.2 R7.2
NetC40_1: C40.1 L16.1 T1.1
NetC41_1: C41.1 C42.2 R9.2 VT1.2
NetC41_2: C41.2 T1.2
NetC42_1: C42.1 R11.1
NetC43_1: C43.1 R10.2
NetC43_2: C43.2 R11.2 T2.2 VT1.4
NetC44_2: C44.2 T4.2 T5.2
NetC45_1: C45.1 R13.1 T1.4 VT5.3
NetC45_2: C45.2 R13.2 R17.2
NetC46_2: C46.2 R4.2 R15.2
NetC48_1: C48.1 C49.1 C57.1 T3.1 VT3.3
NetC49_2: C49.2 T4.1 T5.1
NetC50_1: C50.1 C51.1 R14.1 VT4.2
NetC50_2: C50.2 R12.1
NetC51_2: C51.2 T1.3
NetC52_1: C52.1 R16.2
NetC52_2: C52.2 R12.2 T2.4 VT4.4
NetC53_1: C53.1 L17.1 T2.1 T2.3
NetC54_1: C54.1 J1.1
NetC54_2: C54.2 R19.1 R20.2
NetC55_1: C55.1 R19.2 R21.2
NetC55_2: C55.2 R17.1 R22.2 VT5.1
NetC56_1: C56.1 R6.1 R9.1 R14.2 VD1.2
NetC57_2: C57.2 R18.1
NetC58_1: C58.1 R24.2
NetC58_2: C58.2 R23.2 VT5.2
NetC60_1: C60.1 L18.2 R25.2 VT7.2
NetC62_1: C62.1 R25.1 VT6.3 VT7.1
NetC62_2: C62.2 R27.1 VT6.1 VT7.3
NetC64_2: C64.2 DA1.3 VT8.3
NetC73_1: C73.1 DA3.3 L19.1 R38.2
NetC74_2: C74.2 DA3.5 L20.2 R39.1
NetCON1_12: CON1.12 R41.2 R42.2
NetCON1_14: CON1.14 R37.2 R40.2
NetDA1_1: DA1.1 R28.1 R29.2
NetDA3_1: DA3.1 DA3.2 R37.1
NetDA3_6: DA3.6 DA3.7 R41.1
NetJ3_1: J3.1 K8.4 K8.9
NetJ4_1: J4.1 K8.3 K8.10 VD5.3
NetK1_3: K1.3 K1.10
NetK1_4: K1.4 T4.3
NetK1_9: K1.9 K2.4
NetK2_3: K2.3 K2.10
NetK2_9: K2.9 K3.4
NetK3_3: K3.3 K3.10
NetK3_9: K3.9 K4.4
NetK4_3: K4.3 K4.10
NetK4_9: K4.9 K5.4
NetK5_3: K5.3 K5.10
NetK5_9: K5.9 K6.4
NetK6_3: K6.3 K6.10
NetK6_9: K6.9 K7.4
NetK7_3: K7.3 K7.10
NetK7_9: K7.9 T6.1
NetK8_5: K8.5 K8.8 T6.2 T6.6
NetL19_2: L19.2 R33.1
NetL20_1: L20.1 R36.1
NetR1_2: R1.2 R3.3
NetR2_2: R2.2 R4.3
NetR3_1: R3.1 R4.1 R5.1
NetR7_1: R7.1 R8.1 R10.1 VT2.1
NetR15_1: R15.1 R16.1 R18.2 VT3.1
NetR26_1: R26.1 VT8.1 VT9.3
NetR33_2: R33.2 VD2.1
NetR34_2: R34.2 T6.7 VD2.2
NetR35_2: R35.2 T6.4 T6.8 VD3.2
NetR36_2: R36.2 VD3.1
NetT4_4: T4.4 T5.3
Q1: DA2.7 DD1.1
Q2: DA2.6 DD1.2
Q3: DA2.5 DD1.3
Q4: DA2.4 DD1.4
Q5: DA2.3 DD1.5
Q6: DA2.2 DD1.6
Q7: DA2.1 DD1.7
RCK: CON1.4 CON2.2 DD1.12
SER_IN: CON1.2 CON2.1 DD1.14
SR_OUT: CON2.6 DD1.9
SRCK: CON1.6 CON2.3 DD1.11
SRCLR: CON1.8 CON2.4 DD1.10 R31.1
V5V0: C66.2 C67.2 C68.2 C69.2 C71.2 C72.2 CON1.17 CON1.18 CON1.19 CON1.20 CON2.9 CON2.10 DA3.8 DD1.16 R31.2
V9V0: C36.2 C65.2 DA1.2 DA1.4 L16.2 L17.2 R5.2 R6.2 R28.2
V12V0: C17.2 C18.2 C19.2 C20.2 C33.2 C34.2 C35.2 C59.1 C63.1 C70.2 DA2.9 J2.1 K1.1 K2.1 K3.1 K4.1 K5.1 K6.1 K7.1 K8.1 L18.1 R26.2 VD4.1 VT8.2
VPWR: C61.1 L15.2 VT6.2
pads on no net: CON1.16 DD1.15 J3.3 VT2. VT3.

## Silkscreen, mask and mechanical layers (free items; w line width, h text height)
Mechanical 1:
  circle w0.254: c279,186 r3.606
  circle w0.254: c369,186 r3.606
  circle w0.254: c369,256 r3.606
  circle w0.254: c279,256 r3.606
  circle w0.254: c279,256 r2
  circle w0.254: c369,256 r2
  circle w0.254: c279,186 r2
  circle w0.254: c369,186 r2